# EAGLE board Valve Driver V4.1 (EAGLE 6.4)
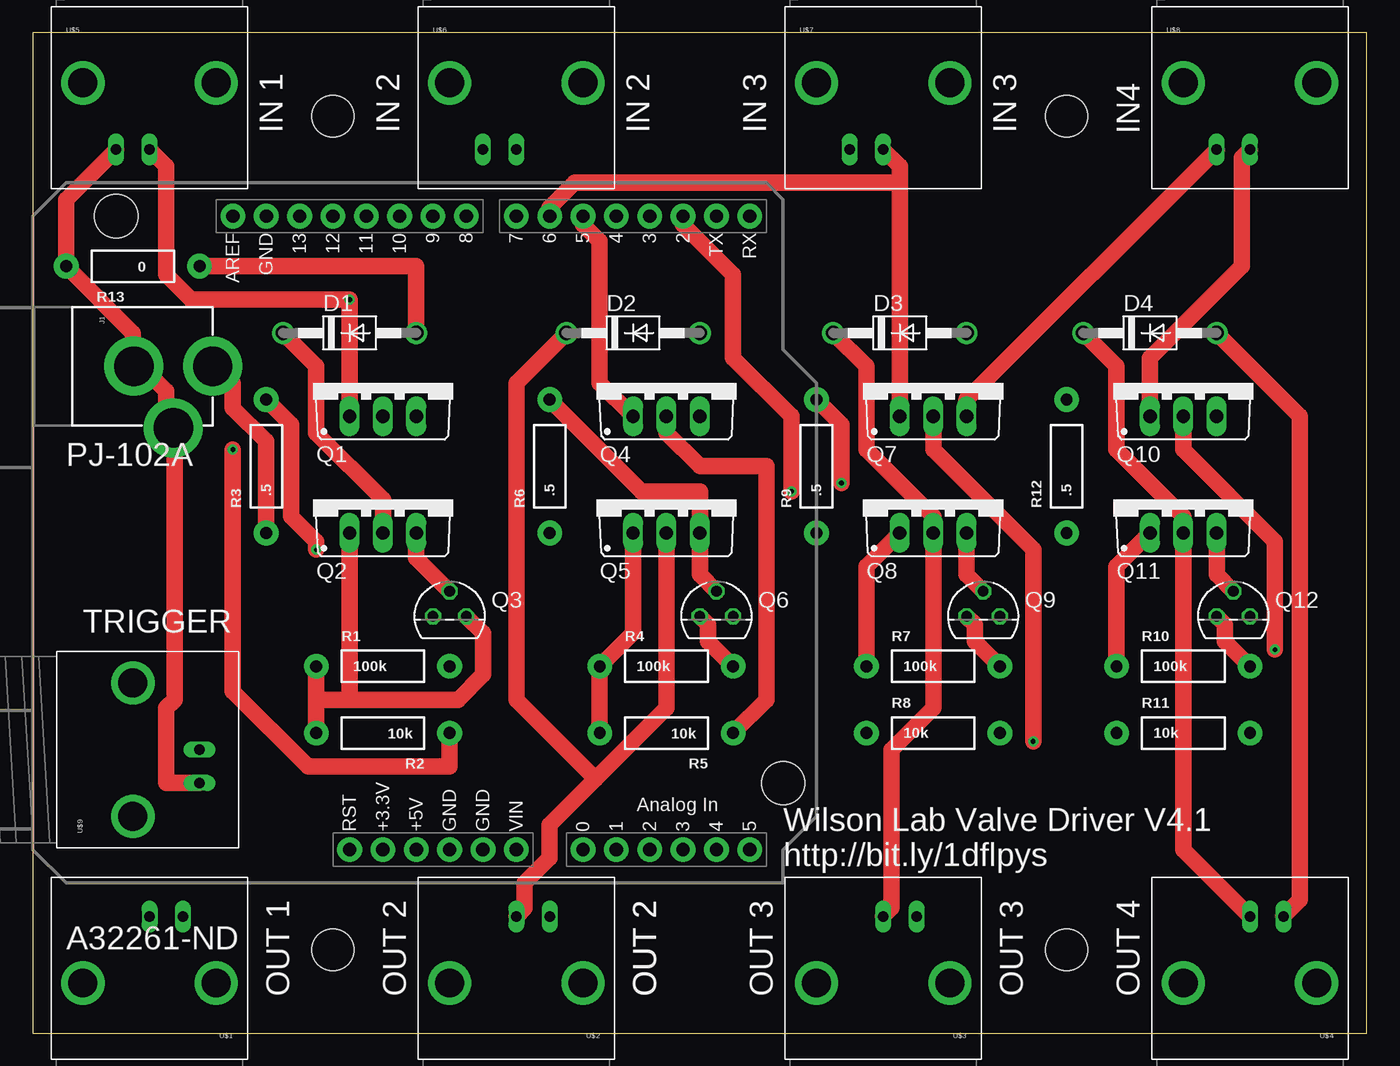
[diagram p0: board, top side]
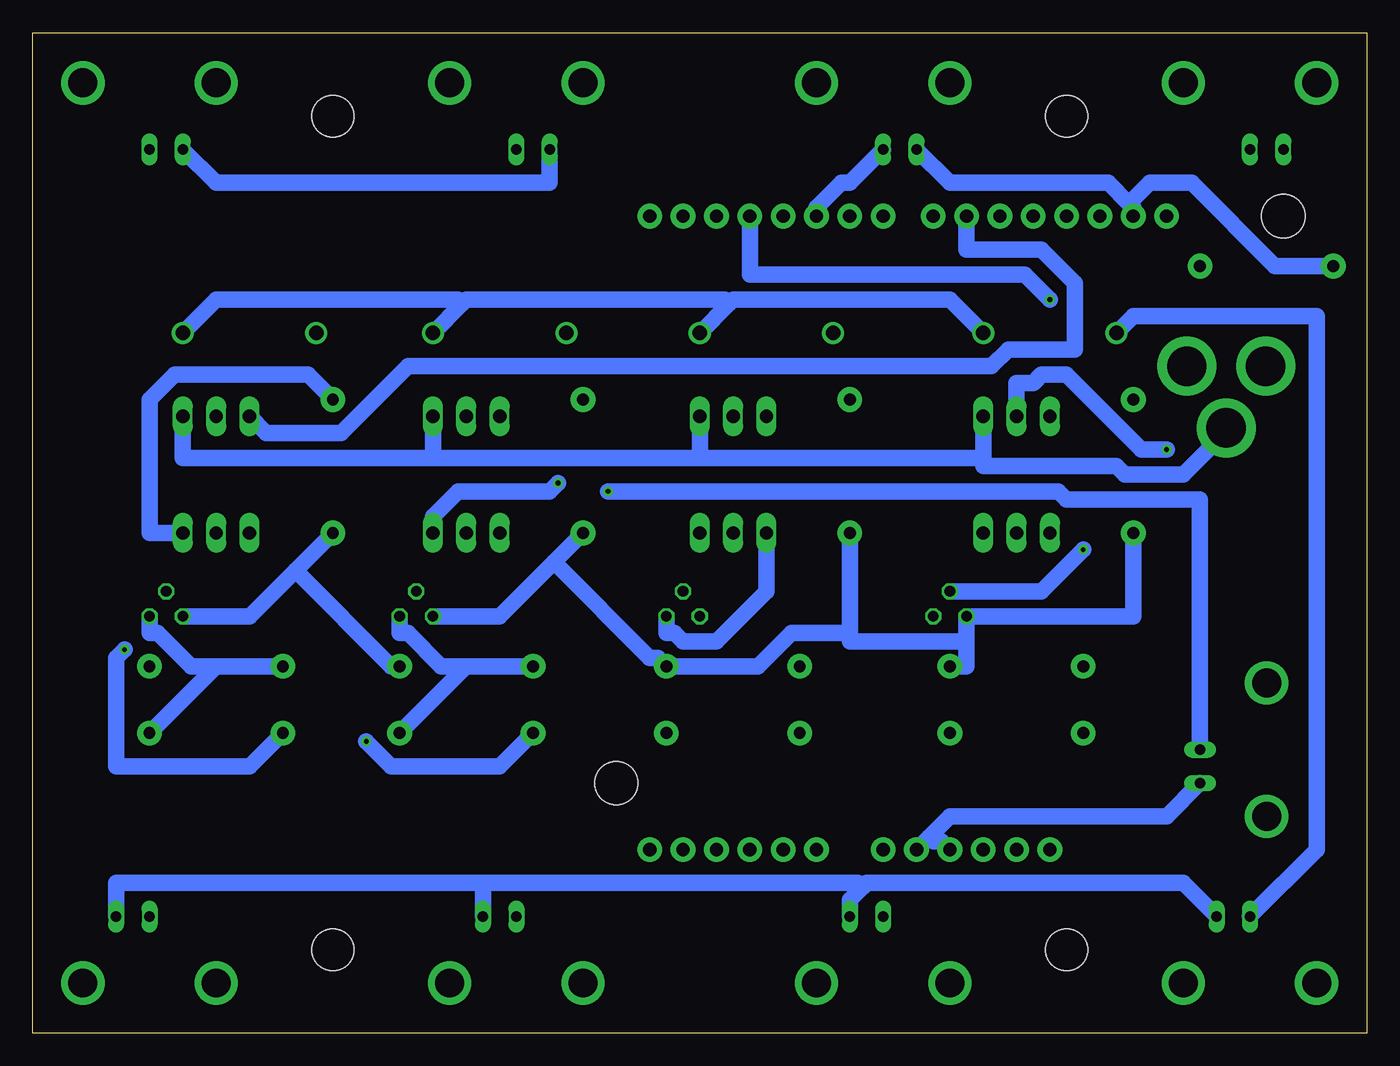
[diagram p1: board, bottom side, seen from below]

Size 101.6 x 76.2 mm. Coordinates in mm from the lower left corner, seen from the top.
Outline: 0,0 101.6,0 101.6,76.2 0,76.2 0,0
Copper layers (1*16): Top 0.0178mm / dielectric 59mil / Bottom 0.0178mm
Design rules "SSC-EAGLE-2Lyr_v1.0.0.3": minimum track width 6mil, minimum drill 14mil, track to track 6mil, track to pad 6mil, pad to pad 6mil, via to via 6mil, smd to smd 6mil, copper to edge 20mil, drill to drill 16mil, minimum pad ring 8mil, minimum via ring 8mil, stop-mask expansion 3mil, vias tented up to drill 0mil, thermal gap 10mil
Net classes: 0 default: width 1.27 mm, clearance 0.635 mm
Holes 3.2 mm at 22.86,6.35 78.74,6.35 22.86,69.85 78.74,69.85

## Footprints (pad centres in the part's own frame; a part is rotated, then mirrored left to right if it is on the bottom)
DO41-10 = drill 1.118: A 5.08,0; C -5.08,0
POWER_JACK_PTH = drill 2.997 pad 4.318: GND 0,7.7; GNDBREAK 4.7,10.7; PWR 0,13.7
TO220BV = drill 1.016 long: D 0,-2.54; G -2.54,-2.54; S 2.54,-2.54
TO92 = drill 0.813 octagon: 1 1.27,0; 2 0,1.905; 3 -1.27,0
AXIAL-0.4 = drill 0.9 pad 1.88: P$1 -5.08,0; P$2 5.08,0
DUEMILANOVE_SHIELD = drill 1.016 pad 1.88: 3.3V 50.8,26.67; 5V 50.8,29.21; A0 50.8,41.91; A1 50.8,44.45; A2 50.8,46.99; A3 50.8,49.53; A4 50.8,52.07; A5 50.8,54.61; AREF 2.54,15.24; D2 2.54,49.53; D3 2.54,46.99; D4 2.54,44.45; D5 2.54,41.91; D6 2.54,39.37; D7 2.54,36.83; D8 2.54,33.02; D9 2.54,30.48; D10 2.54,27.94; D11 2.54,25.4; D12 2.54,22.86; D13 2.54,20.32; GND@0 50.8,31.75; GND@1 50.8,34.29; GND@2 2.54,17.78; RES 50.8,24.13; RX 2.54,54.61; TX 2.54,52.07; VIN 50.8,36.83 | hole 3.302: 45.72,57.15; 2.54,6.35
BNC = drill 2.2: 3 -5.08,5.08; 4 5.08,5.08 | drill 0.8 long: GND -2.54,0; S 0,0

## Placement (x,y rotation side)
D1  1N4004  [DO41-10]  24.13,53.34 0 top
D2  1N4004  [DO41-10]  45.72,53.34 0 top
D3  1N4004  [DO41-10]  66.04,53.34 0 top
D4  1N4004  [DO41-10]  85.09,53.34 0 top
J1  POWER_JACKPTH  [POWER_JACK_PTH]  0,50.8 270 top
Q1  IRF530  [TO220BV]  26.67,49.53 0 top
Q2  IRF9530  [TO220BV]  26.67,40.64 0 top
Q3  2N3906  [TO92]  31.75,31.75 0 top
Q4  IRF530  [TO220BV]  48.26,49.53 0 top
Q5  IRF9530  [TO220BV]  48.26,40.64 0 top
Q6  2N3906  [TO92]  52.07,31.75 0 top
Q7  IRF530  [TO220BV]  68.58,49.53 0 top
Q8  IRF9530  [TO220BV]  68.58,40.64 0 top
Q9  2N3906  [TO92]  72.39,31.75 0 top
Q10  IRF530  [TO220BV]  87.63,49.53 0 top
Q11  IRF9530  [TO220BV]  87.63,40.64 0 top
Q12  2N3906  [TO92]  91.44,31.75 0 top
R1  100k  [AXIAL-0.4]  26.67,27.94 0 top
R2  10k  [AXIAL-0.4]  26.67,22.86 180 top
R3  .5  [AXIAL-0.4]  17.78,43.18 90 top
R4  100k  [AXIAL-0.4]  48.26,27.94 0 top
R5  10k  [AXIAL-0.4]  48.26,22.86 180 top
R6  .5  [AXIAL-0.4]  39.37,43.18 90 top
R7  100k  [AXIAL-0.4]  68.58,27.94 0 top
R8  10k  [AXIAL-0.4]  68.58,22.86 0 top
R9  .5  [AXIAL-0.4]  59.69,43.18 90 top
R10  100k  [AXIAL-0.4]  87.63,27.94 0 top
R11  10k  [AXIAL-0.4]  87.63,22.86 0 top
R12  .5  [AXIAL-0.4]  78.74,43.18 90 top
R13  0  [AXIAL-0.4]  7.62,58.42 180 top
U1  ARDUINO_SHIELDLABEL  [DUEMILANOVE_SHIELD]  0,64.77 270 top
U$1  BNCPTH  [BNC]  8.89,8.89 180 top
U$2  BNCPTH  [BNC]  36.83,8.89 180 top
U$3  BNCPTH  [BNC]  64.77,8.89 180 top
U$4  BNCPTH  [BNC]  92.71,8.89 180 top
U$5  BNCPTH  [BNC]  8.89,67.31 0 top
U$6  BNCPTH  [BNC]  36.83,67.31 0 top
U$7  BNCPTH  [BNC]  64.77,67.31 0 top
U$8  BNCPTH  [BNC]  92.71,67.31 0 top
U$9  BNCPTH  [BNC]  12.7,21.59 90 top

## Library data of the parts
D1-D4 = diode
J1 U$1-U$9 = SparkFun-Connectors
Q1 Q2 Q4 Q5 Q7 Q8 Q10 Q11 = transistor-power
Q3 Q6 Q9 Q12 = transistor-pnp
R1-R13 = SparkFun
U1 = SparkFun-Boards

## Nets
+24V: J1.PWR Q3.3 Q6.3 Q9.3 Q12.3 R1.P$2 R3.P$1 R4.P$2 R6.P$1 R7.P$2 R9.P$1 R10.P$2 R12.P$1
DGND: D1.A D2.A D3.A D4.A R13.P$1 U$1.GND U$2.GND U$3.GND U$4.GND
GND: J1.GND J1.GNDBREAK Q1.S Q4.S Q7.S Q10.S R13.P$2 U1.GND@0 U1.GND@1 U1.GND@2 U$5.GND U$6.GND U$7.GND U$8.GND U$9.GND
IN1: Q1.G U1.D3 U$5.S
IN2: Q4.G U1.D5 U$6.S
IN3: Q7.G U1.D6 U$7.S
IN4: Q10.G U1.D9 U$8.S
N$1: Q2.G Q3.1 R1.P$1 R2.P$2
N$2: Q1.D R2.P$1
N$3: Q2.S Q3.2 R3.P$2
N$4: D1.C Q2.D U$1.S
N$5: Q5.G Q6.1 R4.P$1 R5.P$2
N$6: Q4.D R5.P$1
N$7: Q5.S Q6.2 R6.P$2
N$8: D2.C Q5.D U$2.S
N$9: Q8.G Q9.1 R7.P$1 R8.P$2
N$10: Q7.D R8.P$1
N$11: Q8.S Q9.2 R9.P$2
N$12: D3.C Q8.D U$3.S
N$13: Q11.G Q12.1 R10.P$1 R11.P$2
N$14: Q10.D R11.P$1
N$15: Q11.S Q12.2 R12.P$2
N$16: D4.C Q11.D U$4.S
TRIGGER: U1.D2 U$9.S

## Tracks (layer width: path | path; a pad name or v marks a point on that pad's centre or on a via)
+24V
  Top 1.27: Q12.3 90.81,31.11 90.81,29.84 R10.P$2 | Q6.3 51.44,31.11 51.44,29.84 R4.P$2 | Q9.3 71.75,31.11 71.75,29.84 R7.P$2 | R3.P$1 17.78,45.09 15.24,47.62 15.24,49.53 13.97,50.8 J1.PWR
  Bottom 1.27: 81.6,35.24 85.09,31.75 Q12.3 | 81.6,35.24 R12.P$1 | 61.91,35.88 66.04,31.75 Q9.3 | 61.91,35.88 R9.P$1 | 61.91,35.88 54.61,28.57 53.98,28.57 R4.P$2 46.35,27.94 43.81,30.48 39.37,30.48 | 81.6,35.24 74.3,27.94 R7.P$2 | 30.48,29.84 30.48,27.94 R1.P$2 | 30.48,29.84 Q3.3 17.78,31.75 R3.P$1 | 39.37,30.48 39.37,29.84 30.48,29.84 | 39.37,30.48 R6.P$1
DGND
  Top 1.27: R13.P$1 29.21,58.42 D1.A | U$4.GND 96.52,10.16 96.52,46.99 D4.A
  Bottom 1.27: U$1.GND 13.97,11.43 38.1,11.43 38.42,11.11 | 38.42,11.11 39.37,10.16 U$2.GND | 67.31,11.43 U$3.GND | 67.31,11.43 38.73,11.43 38.42,11.11 | U$4.GND 95.25,11.43 67.31,11.43 | D1.A 31.75,55.88 48.26,55.88 48.58,55.56 | D2.A 48.58,55.56 | 68.9,55.56 68.58,55.88 48.9,55.88 48.58,55.56 | 68.9,55.56 D3.A | D4.A 87.63,55.88 69.22,55.88 68.9,55.56
GND
  Top 1.27: U$5.GND 2.54,63.5 R13.P$2 7.62,53.34 7.62,50.8 J1.GND 8.26,50.8 10.16,48.9 10.16,46.35 J1.GNDBREAK 10.79,45.72 10.79,25.4 10.16,24.77 10.16,19.05 U$9.GND | U$8.GND 71.12,48.26 Q7.S
  Bottom 1.27: U$6.GND 31.75,64.77 19.68,64.77 18.1,63.18 | 18.1,63.18 17.78,62.87 U1.GND@2 | 18.1,63.18 16.51,64.77 13.34,64.77 6.99,58.42 R13.P$2 | U$7.GND 62.23,64.77 87.63,64.77 U$8.GND | U$9.GND 15.24,16.51 31.75,16.51 33.34,14.92 | U1.GND@1 33.34,14.92 | U1.GND@0 32.38,14.61 33.02,14.61 33.34,14.92 | 29.21,43.81 29.21,43.18 19.05,43.18 18.41,42.55 13.97,42.55 10.79,45.72 J1.GNDBREAK | 29.21,43.81 Q1.S | 50.8,43.81 Q4.S | 29.21,43.81 50.8,43.81 | 71.12,43.81 Q7.S | 50.8,43.81 71.12,43.81 | Q10.S 90.17,43.81 71.12,43.81
IN1  (via drill 0.36)
  Top 1.27: U$5.S 10.16,66.04 10.16,57.78 12.06,55.88 v24.13,55.88 Q1.G
  Bottom 1.27: U1.D3 46.99,57.78 26.04,57.78 v24.13,55.88
IN2
  Top 1.27: Q4.G 43.18,49.53 43.18,60.33 41.91,61.59 U1.D5
  Bottom 1.27: U$6.S 39.37,64.77 40.01,64.77 41.91,62.87 U1.D5
IN3
  Top 1.27: U$7.S 66.04,66.04 66.04,64.77 | Q7.G 66.04,64.77 | U1.D6 39.37,62.87 41.27,64.77 66.04,64.77
IN4
  Top 1.27: U$8.S 92.08,66.67 92.08,58.42 85.09,51.44 Q10.G
  Bottom 1.27: U1.D9 30.48,59.69 24.77,59.69 22.23,57.15 22.23,52.07 27.3,52.07 28.57,50.8 73.03,50.8 78.11,45.72 83.82,45.72 Q10.G
N$1
  Top 1.27: Q3.1 34.29,30.48 34.29,27.3 32.38,25.4 24.13,25.4 | 21.59,25.4 24.13,25.4 | R1.P$1 21.59,25.4 | 24.13,25.4 Q2.G | 21.59,25.4 R2.P$2
N$2  (via drill 0.36)
  Top 1.27: v15.24,44.45 15.24,26.04 20.95,20.32 31.75,20.32 R2.P$1
  Bottom 1.27: Q1.D 26.67,49.53 25.4,49.53 24.77,50.16 22.86,50.16 17.14,44.45 v15.24,44.45
N$3  (via drill 0.36)
  Top 1.27: Q3.2 29.21,36.2 Q2.S | R3.P$2 19.68,46.35 19.68,39.37 21.59,37.47 v21.59,36.83
  Bottom 1.27: v21.59,36.83 24.77,33.66 Q3.2
N$4
  Top 1.27: Q2.D 26.67,40.64 21.59,45.72 21.59,50.8 D1.C
  Bottom 1.27: U$1.S 3.81,13.97 3.81,54.61 17.78,54.61 D1.C
N$5
  Top 1.27: R5.P$2 R4.P$1 45.72,30.48 Q5.G
  Bottom 1.27: Q6.1 53.34,30.48 52.7,30.48 52.07,29.84 49.53,29.84 45.72,33.66 Q5.G
N$6
  Top 1.27: Q4.D 48.26,45.72 50.8,43.18 55.88,43.18 55.88,25.4 R5.P$1
N$7
  Top 1.27: Q6.2 50.8,34.92 Q5.S 50.8,41.27 46.35,41.27 R6.P$2
N$8
  Top 1.27: U$2.S 37.47,9.53 37.47,11.43 39.37,13.34 39.37,15.88 42.86,19.37 | 42.86,19.37 48.26,24.77 Q5.D | D2.C 36.83,49.53 36.83,25.4 42.86,19.37
N$9
  Top 1.27: Q8.G 63.5,35.56 R7.P$1
  Bottom 1.27: Q9.1 73.66,30.48 73.03,30.48 70.48,27.94 68.58,27.94 | R7.P$1 68.58,27.94 | 68.58,27.94 R8.P$2
N$10  (via drill 0.36)
  Top 1.27: Q7.D 68.58,44.45 76.2,36.83 v76.2,22.23
  Bottom 1.27: v76.2,22.23 74.3,20.32 66.04,20.32 R8.P$1
N$11  (via drill 0.36)
  Top 1.27: Q9.2 71.12,34.92 Q8.S | R9.P$2 61.59,46.35 v61.59,41.91
  Bottom 1.27: v61.59,41.91 62.23,41.27 69.22,41.27 71.12,39.37 Q8.S
N$12
  Top 1.27: U$3.S 65.41,9.53 65.41,21.59 68.58,24.77 Q8.D 68.58,39.37 63.5,44.45 63.5,50.8 D3.C
N$13
  Top 1.27: Q11.G 82.55,35.56 R10.P$1
  Bottom 1.27: Q12.1 92.71,30.48 92.08,30.48 89.53,27.94 87.63,27.94 | R10.P$1 87.63,27.94 | 87.63,27.94 R11.P$2
N$14  (via drill 0.36)
  Top 1.27: Q10.D 87.63,44.45 94.61,37.47 v94.61,29.21
  Bottom 1.27: v94.61,29.21 95.25,28.57 95.25,20.32 85.09,20.32 R11.P$1
N$15
  Top 1.27: Q12.2 90.17,34.92 Q11.S
  Bottom 1.27: R12.P$2 80.64,50.16 90.81,50.16 92.71,48.26 92.71,38.1 Q11.S
N$16
  Top 1.27: U$4.S 87.63,13.97 Q11.D 87.63,39.37 82.55,44.45 82.55,50.8 D4.C
TRIGGER  (via drill 0.36)
  Top 1.27: v57.78,41.27 57.78,46.99 53.34,51.44 53.34,57.78 49.53,61.59 U1.D2
  Bottom 1.27: U$9.S 12.7,40.64 22.86,40.64 23.5,41.27 v57.78,41.27

## Text on the board
tPlace: IN4 | IN 1 | IN 2 | IN 2 | IN 3 | IN 3 | PJ-102A | TRIGGER | Wilson Lab Valve Driver V4.1 / http://bit.ly/1dflpys | OUT 1 | OUT 2 | OUT 2 | OUT 2 | OUT 3 | OUT 3 | OUT 4 | A32261-ND